# Altium PCB PCB1.PcbDoc
Units mil, origin at the board's own origin, x right, y up, seen from the top; angles counter-clockwise.
Board outline 4678 x 2099 mil, 2 copper layers (Top Layer, Bottom Layer); 40 components, 28 nets, 102 pads, 5 vias.
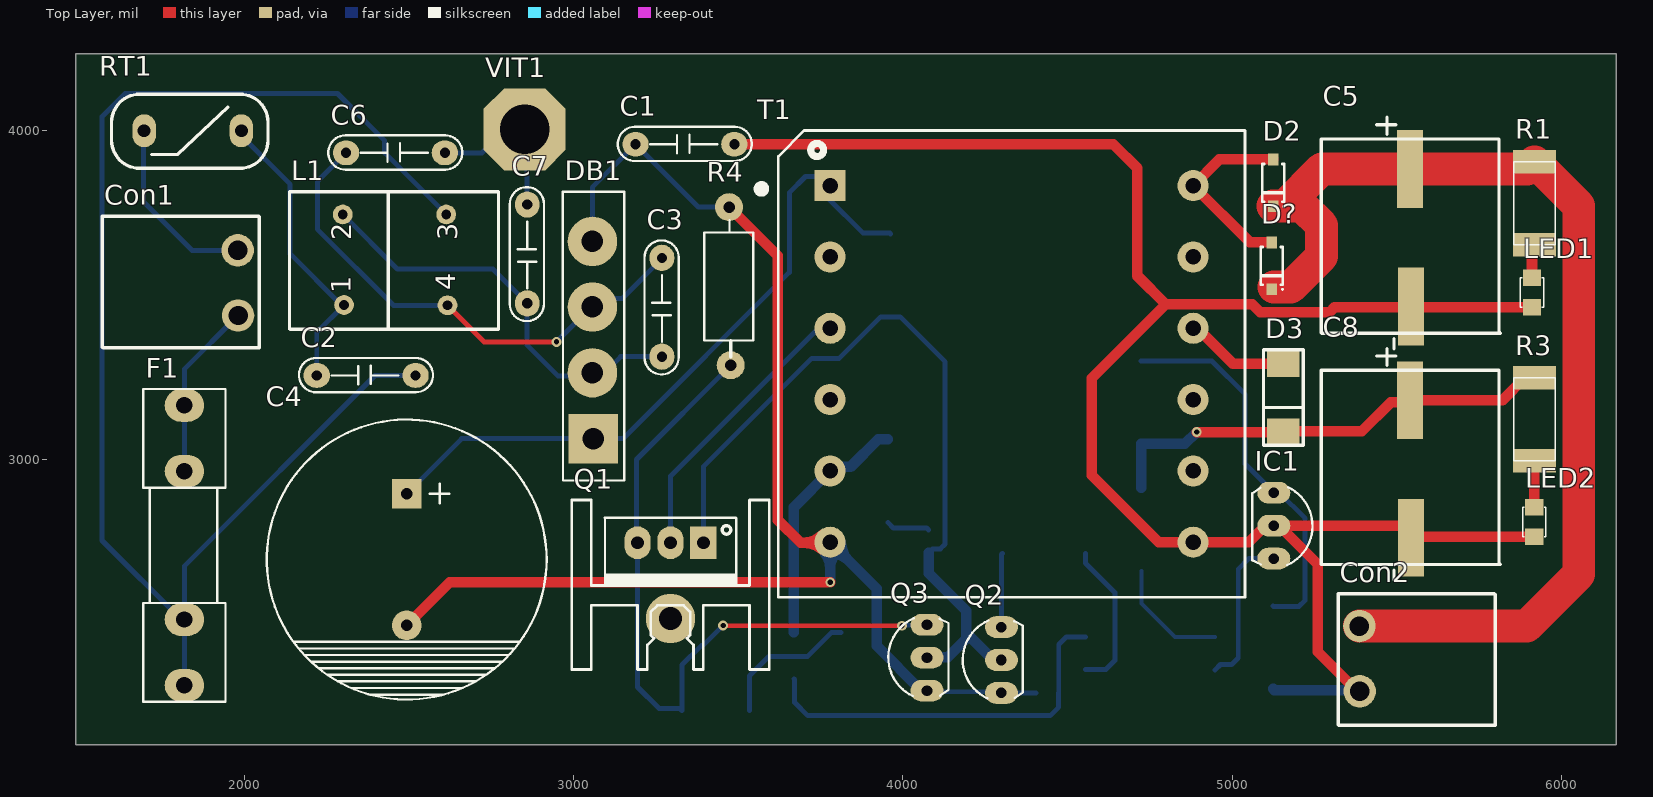
[diagram p0: Top Layer view]
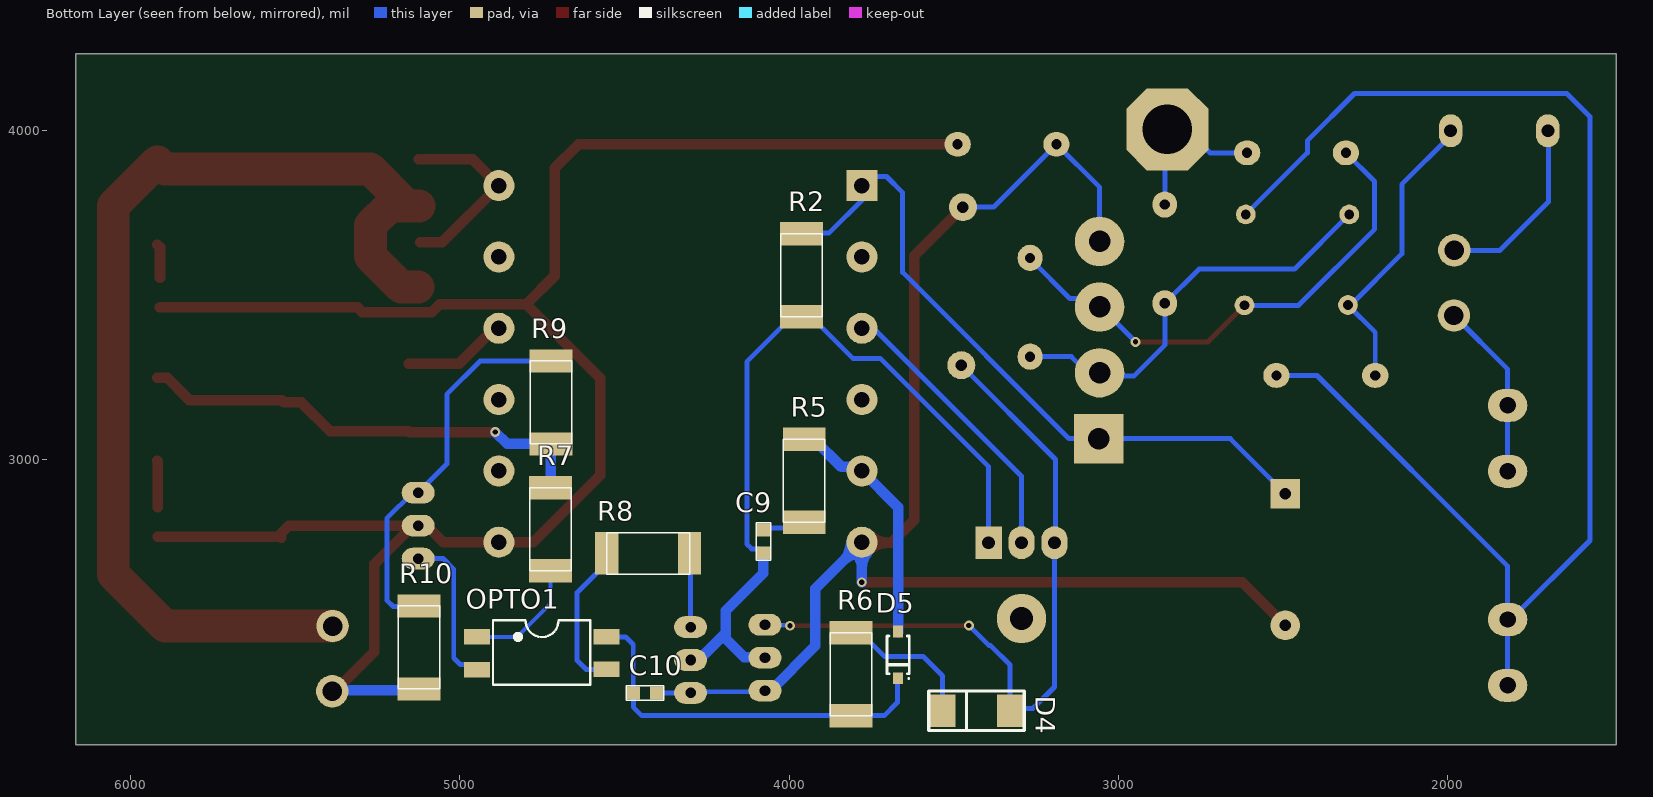
[diagram p1: Bottom Layer view, seen from below]
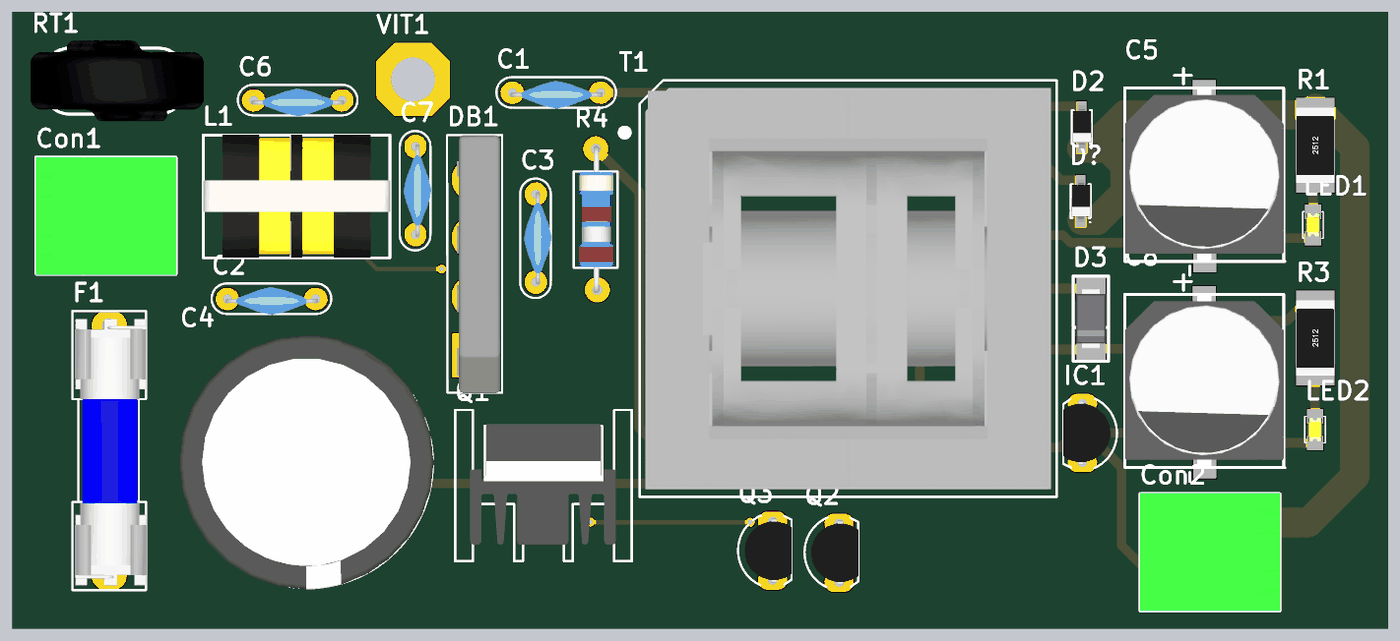
[diagram p2: 3D render of the assembled board from above, using the file's embedded part models]
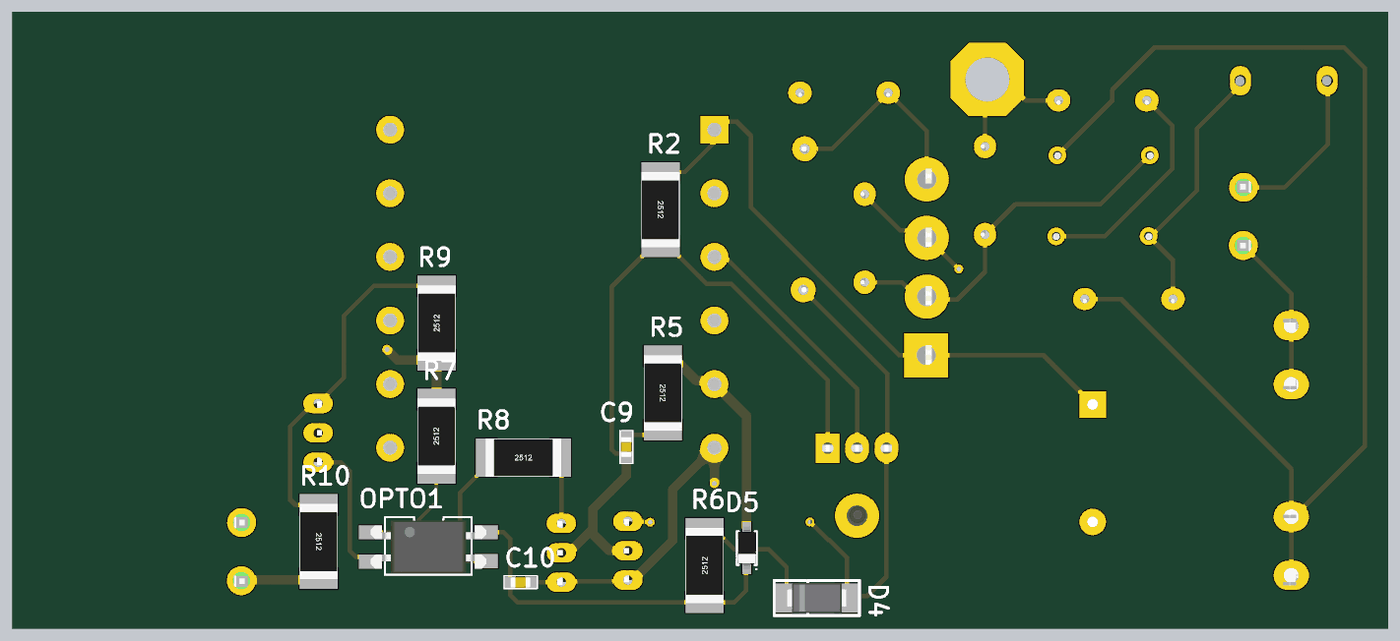
[diagram p3: 3D render of the assembled board from below, using the file's embedded part models]

## Layer stack, top to bottom
Top Solder: solder mask 0.4, Solder Resist, Dk 3.5
Top Layer: signal copper 1.4
Dielectric 1: dielectric 12.6, FR-4, Dk 4.8
Bottom Layer: signal copper 1.4
Bottom Solder: solder mask 0.4, Solder Resist, Dk 3.5

## Board outline
1488,2134 6166,2134 6166,4233 1488,4233

## Design rules (kind name [scope] priority, off if disabled: settings)
Clearance [All] p1: gap=10 ignorepadtopadclearanceinfootprint=FALSE except(0: Arc-Hole Track-Hole SMDPad-Hole THPad-Hole Via-Hole Fill-Hole Poly-Hole Region-Hole Text-Hole)
PolygonConnect [All] p1: connectstyle=Relief reliefconductorwidth=10 reliefentries=4 polygonreliefangle="90 Angle" airgapwidth=10
RoomDefinition DC-DC [InComponentClass('DC-DC')] p1: confinementstyle=ConfineIn formatcopy=TRUE lockcomponents=FALSE outline 0,0 2000,0 2000,1000 0,1000
RoutingVias [All] p1: holewidth=16 width=30 viastyle="Through Hole" minholewidth=16 minwidth=30 maxholewidth=16 maxwidth=30
SolderMaskExpansion [All] p1: expansion=4 istentingtop=FALSE
Width [All] p1: maxlimit=100 minlimit=12 preferedwidth=32
30 further rules are at their usual default settings.

## Components (designator, comment, footprint, x,y, rotation, side; value= is the part's Value field where it differs from the comment)
C1 "101" CN3 3338,3958 r180 top
C2 "0.47uF" CN3 2370,3256 r180 top
C3 "0.47uF" CN3 3268,3463 r270 top
C4 "47u" CP4/8.5 2493,2897 r270 top
C5 "cap smd" "cap 13x14mm" 5865,3664 r90 top
C6 "102" CN3 2459,3932 r180 top
C7 "102" CN3 2859,3625 r270 top
C8 "cap smd" "cap 13x14mm" 5865,2962 r90 top
C9 "222" "cap 0603" 4078,2717.32 r90 bottom
C10 "104" "cap 0603" 4403,2292 r0 bottom
Con1 "Con2P" connector2P 1795,3543 r0 top
Con2 "Con2P" connector2P 5572,2390 r180 top
D2 "1N4148" SOD123 5124,3841 r270 top
D3 "1N5822" "DO214 SMA" 5155,3219 r90 top
D4 "1N5822" "DO214 SMA" 3401,2238 r180 bottom
D5 "1N4148" SOD123 3669,2407.87 r270 bottom
D? "1N4148" SOD123 5120,3589 r270 top
DB1 "Diode Brideg" "DIO-Bri 5A" 3057,3064 r90 top value="Cau 1A"
F1 "Fuse" Fuse 1818,2740 r270 top
IC1 "TL431" TO92-123 5126,2800 r270 top
L1 "Indutor" UU9.8 2350,3427 r90 top
LED1 "LED smd" LED-0805-Yellow 5910,3553 r270 top
LED2 "LED smd" LED-0805-Yellow 5917,2856 r270 top
OPTO1 "PC817" "PC817 smd" 4747,2413 r180 bottom
Q1 "Mos IRF840" TO220H1 3294,2748 r180 top value=IRF840
Q2 "2SC1815" TO92-123 4299,2392 r90 top value=C1815
Q3 "2SC1815" TO92-123 4073,2399 r90 top value=C1815
R1 "1k" RES-SMD-2512 5923,3779 r90 top
R2 "1M" RES-SMD-2512 3967,3560 r270 bottom
R3 "330" RES-SMD-2512 5923,3123 r90 top
R4 "0.1R" RES-1/2W 3472,3507 r90 top
R5 "1k" RES-SMD-2512 3959,2936 r270 bottom
R6 "4k7" RES-SMD-2512 3807,2349 r90 bottom
R7 "4k7" RES-SMD-2512 4719,2789 r90 bottom
R8 "4k7" RES-SMD-2512 4428,2711 r180 bottom
R9 "4k7" RES-SMD-2512 4718,3174 r90 bottom
R10 "4k7" RES-SMD-2512 5129,2430 r270 bottom
RT1 "NTC" "NTC D13" 1696,3999 r0 top
T1 "360-400 V (DC)" ETD34 4330,3291 r0 top
VIT1 "1" VIT 2851,4003 r0 top

## Footprints (in the part's own frame and the unit in brackets; to place one, negate y for a bottom-side part, rotate by r counter-clockwise, add the part's x,y. Pads: shape width x height; smd on the part's side, far side on the other; paste and mask are expansions set on the pad)
"cap 13x14mm" [mm] "cap 13x14mm"
  rect 6x2 smd: 1(5.563,8.255) 2(-5.055,8.204)
  silkscreen extent -8.31,1.3 9.55,15.11, body extent -7.09,1.4 7.91,15.1, height 14
"cap 0603" [mm] "cap 0603"
  rect 1x1 smd: 1(0,0) 2(1.77,0)
  silkscreen extent -0.56,-0.56 2.31,0.56, body extent 0,-0.46 1.77,0.49, height 0.88
CN3 [mil] "Cap np W 0.3"
  oval 80x75 hole 31: 1(-150,0) 2(150,0)
  silkscreen extent -203,-53 204,51, body extent -158,-40 158,54, height 419
connector2P [mm] "2EDGR-5.08-02P"
  round 2.5 hole 1.5: 1(4.699,2.362) 2(4.724,-2.667)
  silkscreen extent -5.74,-5.16 6.35,4.98, body extent -5.75,-5.21 6.35,4.95, height 9.1
CP4/8.5 [mil] "Tu hoa 4700uF/50V"
  rect 90x90 hole 35: 1(0,0)
  round 90 hole 35: 2(400,0)
  silkscreen extent -225,-425 625,425, body extent -236,-438 630,428, height 984
"DIO-Bri 5A" [mil] "Brigde 5A"
  rect 150x150 hole 65: 1(0,-2)
  round 150 hole 65: 2(200,0) 3(400,0) 4(599,0)
  silkscreen extent -127,-97 750,90, body extent -129,-90 749,58, height 937
"DO214 SMA" [mm] "DO214 SMA"
  rect 2x2.5 smd: A(1.838,0) K(-3.362,0)
  silkscreen extent -4.44,-1.52 2.92,1.52, body extent -3.36,-1.3 1.84,1.3, height 2.4
ETD34 [mm] "THT Transformer, 12-Leads, Body 36 x36 mm"
  rect 2.4x2.4 hole 1.2: 1(-14,13.75)
  round 2.4 hole 1.2: 2(-14,8.25) 3(-14,2.75) 4(-14,-2.75) 5(-14,-8.25) 6(-14,-13.75) 7(14,-13.75) 8(14,-8.25) 9(14,-2.75) 10(14,2.75) 11(14,8.25) 12(14,13.75)
  silkscreen extent -19.6,-18 18,18, body extent -17.5,-17.35 17.5,17.35, height 25.77
Fuse [mil] "De Fuse"
  oval 100x120 hole 50: 1(-425,0) 1(-225,0) 2(225,0) 2(425,0)
  silkscreen extent -475,-125 475,125, body extent -448,-117 459,127, height 378
LED-0805-Yellow [mil]
  rect 50x55 smd: 1(0,0) 2(90,0)
  silkscreen extent 0,-35 90,35, body extent 5,-25 85,25, height 43
"NTC D13" [mm]
  oval 1.8x2.54 hole 1: 1(0,0) 2(7.493,0)
  silkscreen extent -2.51,-2.9 9.55,2.82, body extent -3.72,-3.52 11.28,3.48, height 27.5
"PC817 smd" [mm] "PC817 smd"
  rect 2x1.2 smd: 1(-5.105,1.245) 2(-5.105,-1.295) 3(4.895,-1.255) 4(4.895,1.245)
  silkscreen extent -3.86,-2.44 3.63,2.55, body extent -5.1,-2.32 4.9,2.26, height 3.85
RES-1/2W [mil]
  round 85 hole 35: 1(-220,-5) 2(260,0)
  silkscreen extent -195,-74 221,75, body extent -230,-60 270,56, height 121
RES-SMD-2512 [mm] "Chip Capacitor, Body 3.2x2.5mm, IPC Medium Density"
  rect 1.8x3.3 smd: 1(-3.2,0.127) 2(3.2,0.127)
  silkscreen extent -3.2,-1.47 3.2,1.73, body extent -3.2,-1.47 3.2,1.73, height 0.6
SOD123 [mm] "SODFL, 2-Leads, Body 1.55x3.70mm, IPC Low Density"
  rect 0.9x0.8 smd: A(-1.8,0) K(1.8,0)
  silkscreen extent -1.45,-0.85 1.87,0.88, body extent -1.88,-0.77 1.82,0.83, height 1.27
TO92-123 [mil] "TO-92"
  oval 66x100 hole 32: 1(-100,0) 2(0,0) 3(100,0)
  silkscreen extent -117,-65 120,118, body extent -109,-66 109,95, height 245
TO220H1 [mil] "TO-220 - 1-2-3"
  round 150 hole 70: 0(0,230)
  rect 80x100 hole 39: 1(-100,0)
  oval 80x100 hole 39: 2(0,0) 3(100,0)
  silkscreen extent -300,-130 300,385, body extent -246,-82 250,329, height 1000
UU9.8 [mil] "Dang cam giong tro"
  round 60 hole 30: 1(43,47) 2(318,51) 3(318,-263) 4(42,-267)
  silkscreen extent -31,-422 387,213, body extent -30,-423 388,213, height 602
VIT [mil] "VIT"
  oct 250x250 hole 150: VIT1(0,0)

## Part data
C1 C2 C3 C6 C7 C9 C10: library part Cap, "0.47uF/1.6kV"
C4: library part Cap_electric, "cap"
C5 C8: library part Cap_smd
Con1 Con2: library part connector2P, "Connector2P"
D2 D5 D?: library part "Diode 1N4148"
D3 D4: library part "Diode 1N5822", "SS34 1N5822", If(av)=3A, If(rms)=10A, Vrrm=40V
DB1: library part "DIODE BRIGDE", "Convert AC to DC voltage, 4 pin"
IC1: library part TL431_1, "Programmable Shunt Regulator"
L1: library part "Inductor UU9.8", "UU9.8"
Q1: library part IRF840, "MOSFET N - CHANNEL 500V - 0.75 - 8A - TO-220", ID=8A, VDS=500V
Q2 Q3: "NPN 600mW, ECB"
R1 R2 R3 R5 R6 R7 R8 R9 R10: library part "RES SMD", "res smd"
R4: library part Res_1, "Res", Manufacturer="Generic Components", Class=Passive, Published=08/06/2000, Publisher="Altium Hobart Technology Centre", SubClass=R
RT1: library part RT
T1: library part Tranf2, "Resonant Converter WE-LLCR, Ui=360-400 V (DC)", Manufacturer="Würth Elektronik eiSos GmbH", Output Current=6.2A, OutPut Voltage="24 V", PartNo=760895441, (Input Voltage) Ui="360-400 V (DC)", ComponentLink1Description=Manufacturer, ComponentLink1URL=http://www.we-online.de, ComponentLink2Description=Datasheet, ComponentLink2URL=http://katalog.we-online.de/pbs/datasheet/760895441.pdf, Created by="Otto Christin", Created Date="NOV 2013"
VIT1: library part VIT_1, "Oc Vit"

## Via types
v1: diameter 30, hole 16, Top Layer to Bottom Layer, 5 vias

## Nets (pads, with @x,y where several pads share a name; then routed paths per layer and width w, separated by ;. In a path a pad name is that pad's centre, name@x,y a point inside that pad or via, vN(x,y) a via of type N, cw(c..) or ccw(c..) an arc to the next point about the centre after c; other vN are vias at no path point)
12V: C5.1 Con2.2 D2.K D?.K R1.2 | length 3302.6
  Top Layer w100: D2.K 5159.13,3770.13 ; D?.K@5126,3524.13 5177.13,3524.13 5271,3618 5271,3711.56 5212.42,3770.13 5159.13,3770.13 ; Con2.2 5894,2495 6052,2653 6052,3771.39 5918.39,3904.99 R1.2 5917.61,3904.99 5895.62,3883 C5.1 5272,3883 5159.13,3770.13
GND: C1.2 C4.2 C10.1 DB1.4 Q2.1 Q3.1 R4.2 T1.6 | length 4306.6
  Top Layer w15: Q2.1 Q2.1@4316,2292
  Top Layer w32: C4.2 2624,2628 v1(3779,2628) ; R4.2 3620,3619 3620,2817 3689,2748 3777.16,2748 T1.6
  Bottom Layer w15: DB1.4 3057,3827 C1.2 3379,3767 R4.2 ; Q3.1 4076.5,2295.5 4295.5,2295.5 Q2.1 C10.1 C10.1@4403.34,2292.34
  Bottom Layer w32: v1(3779,2628) 3778.82,2628.18 T1.6 3920.14,2608.35 3920.14,2434.86 4056,2299 Q3.1
GND_tc: C1.1 C5.2 C8.2 Con2.1 IC1.2 LED1.2 LED2.2 R10.2 T1.7 | length 5791.2
  Top Layer w32: C1.1 4639,3958 4712,3885 4712,3558 4798,3472 ; Con2.1 5380,2297 5260,2417 5260,2683 IC1.2@5143,2800 ; LED1.2 5542,3463 5310.34,3463 5295.47,3448.13 5085.35,3448.13 5060.97,3472.51 4850.84,3472.51 4850.33,3472 4798,3472 ; LED2.2 5545,2766 C8.2 5542,2776.63 5518.63,2800 IC1.2@5143,2800 ; 4798,3472 4573,3247 4573,2953 4776.34,2749.66 T1.7 5049.46,2749.66 5099.8,2800 IC1.2 IC1.2@5143,2800
  Bottom Layer w32: R10.2 5127.51,2300.5 5383.5,2300.5 Con2.1
NetC2_1: C2.1 F1.2 L1.3 | length 4187.9
  Bottom Layer w15: F1.2@1818,2315 F1.2@1818,2515 ; C2.1 2397,3256 1818,2677 F1.2@1818,2515 ; L1.3 2426,3932 2426,3969 2283,4112 1638,4112 1568,4042 1568,2755 1808,2515 F1.2@1818,2515
NetC2_2: C2.2 L1.1 RT1.2 | length 911.9
  Bottom Layer w15: RT1.2 1991,3984.43 2139,3836.43 2139,3625 2294,3470 L1.1 2220,3387 C2.2
NetC3_1: C3.1 C6.2 DB1.3 L1.4 | length 1571.5
  Top Layer w15: L1.4 2728,3358 v1(2948,3358)
  Bottom Layer w15: C6.2 2222,3845 2222,3700 2453,3469 L1.4 L1.4@2623.13,3462.87 ; v1(2948,3358) 3054,3464 DB1.3 3082.83,3489.83 3147.33,3489.83 3268,3610.5 C3.1
NetC3_2: C3.2 C7.2 DB1.2 L1.2 | length 1271.2
  Bottom Layer w15: L1.2 2465,3579 2755,3579 C7.2 2859,3348 2953,3254 3047,3254 DB1.2 3093.53,3264 3142.53,3313 C3.2
NetC4_1: C4.1 DB1.1 R2.1 T1.1 | length 2119.4
  Bottom Layer w15: C4.1 2660,3064 DB1.1 3150,3064 3655,3569 3655,3811 3704.14,3860.14 3771,3860.14 3771,3796 3879,3688 3959.98,3688 R2.1
NetC8_1: C8.1 D3.K R3.2 R7.2 R9.1 | length 1419.5
  Top Layer w15: v1(4892,3084) v1@4894.63,3086.63
  Top Layer w32: v1(4892,3084) 5152.36,3084 D3.K 5393.63,3086.63 5481,3174 5533,3174 C8.1 5820.48,3181 5888.47,3248.99 R3.2
  Bottom Layer w15: v1@4887.94,3084 v1(4892,3084)
  Bottom Layer w32: R7.2 4723,2915.99 R9.1 4856.02,3048.02 v1(4892,3084)
NetC9_1: C9.1 Q1.1 Q2.2 Q3.2 R2.2 | length 2421.7
  Bottom Layer w15: Q1.1 3394,2979 3723.04,3308.04 3806.5,3308.04 3932.47,3434.01 R2.2 3991.53,3434.01 4128,3297.54 4128,2744 4113.5,2729.5 4090.19,2729.5 C9.1 ; Q3.2 Q3.2@4076.5,2395.5
  Bottom Layer w32: Q3.2 4074,2400 4136,2400 4192,2456 4192,2474 ; C9.1 4078,2655 4192,2541 4192,2474 ; Q2.2 4274,2392 4192,2474
NetC9_2: C9.2 R5.2 | length 133.5
  Bottom Layer w15: R5.2 3971.01,2793 4072,2793 C9.2
NetC10_2: C10.2 D5.K OPTO1.4 R6.1 | length 1183.1
  Bottom Layer w15: D5.K@3669,2335.13 3671,2333.13 3671,2263 3710.98,2223.02 R6.1 4447.02,2223.02 4472.68,2248.68 C10.2 4473,2292.32 4473,2439 4496,2462 OPTO1.4
NetCon1_1: Con1.1 RT1.1 | length 563.7
  Bottom Layer w15: RT1.1 1694,3997 1694,3783 1841,3636 Con1.1
NetCon1_2: Con1.2 F1.1 | length 540.5
  Bottom Layer w15: F1.1@1818,2965 1818,3165 1818,3275 Con1.2
NetD2_A: D2.A D?.A T1.12 | length 586
  Top Layer w32: D?.A 5053.65,3659.87 T1.12 4960.71,3911.87 D2.A
NetD3_A: D3.A T1.10 | length 318.5
  Top Layer w32: T1.10 4894.21,3399.27 5002.13,3291.36 D3.A
NetD4_A: D4.A Q1.3 Q3.3 R4.1 | length 2195.7
  Top Layer w15: v1(3454,2497) 3455,2496 v1(3997,2496)
  Bottom Layer w15: v1(3454,2497) 3392.39,2435.39 3387.39,2435.39 3328.64,2376.64 3328.64,2245 D4.A 3321.65,2245 3259,2245 3194,2310 Q1.3 3191,2751 3191,3001 R4.1 ; v1(3997,2496) 3998.5,2497.5 4071.5,2497.5 Q3.3
NetD4_K: D4.K R6.2 | length 438.5
  Bottom Layer w15: D4.K 3533.37,2343.37 3593,2403 3710.48,2403 3782.47,2474.99 R6.2
NetD5_A: D5.A R5.1 T1.5 | length 749.7
  Bottom Layer w32: D5.A@3669,2476.87 3669,2856.38 T1.5 3790.78,2978.15 3840.65,2978.15 3924.47,3061.98 R5.1
NetIC1_1: IC1.1 R9.2 R10.1 | length 1176.2
  Bottom Layer w15: R9.2 4938.01,3299.99 5039,3199 5039,2987 5099.24,2926.76 5099.24,2923.56 5122.8,2900 IC1.1 5143,2900 5221,2822 5221,2573 5202.67,2554.67 5125.3,2554.67 R10.1
NetIC1_3: IC1.3 OPTO1.2 | length 476.2
  Bottom Layer w15: OPTO1.2 4964.12,2378.12 4998.12,2378.12 5018,2398 5018,2668 5050,2700 IC1.3
NetLED1_1: LED1.1 R1.1 | length 103.3
  Top Layer w32: LED1.1 5910,3645.02 R1.1
NetLED2_1: LED2.1 R3.1 | length 141.4
  Top Layer w32: LED2.1 5917,2996.02 R3.1
NetOPTO1_1: OPTO1.1 R7.1 | length 365.3
  Bottom Layer w12: R7.1 4724,2564 4826,2462 OPTO1.1
NetOPTO1_3: OPTO1.3 R8.1 | length 463.8
  Bottom Layer w15: R8.1 4553.98,2686.47 4644,2596.45 4644,2391 4616,2363 4554.87,2363 OPTO1.3
NetQ1_2: Q1.2 T1.3 | length 876.7
  Bottom Layer w15: Q1.2 3294,2950.07 T1.3@3771,3427.07
NetQ2_3: Q2.3 R8.2 | length 225.2
  Bottom Layer w15: Q2.3 4299,2712.99 R8.2
PE: C6.1 C7.1 VIT1.VIT1 | length 502.7
  Bottom Layer w15: C6.1 2721.89,3932 2792.89,4003 VIT1.VIT1 2859,3995 C7.1
pads on no net: Q1.0 T1.2 T1.4 T1.8 T1.9 T1.11

## Text inside footprints (layer, text, board x,y; h text height)
L1: Top Overlay "1" at 2323,3506 h60 r90; Top Overlay "2" at 2325,3667 h60 r90; Top Overlay "4" at 2641,3514 h60 r90; Top Overlay "3" at 2647,3667 h60 r90